# Altium PCB BottomBoard.PcbDoc
Units mm, origin at the board's own origin, x right, y up, seen from the top; angles counter-clockwise.
Board outline 50 x 20 mm, 2 copper layers (Top, Bottom); 57 components, 46 nets, 175 pads, 11 vias.
Unrouted connection lines stored in the file: 39.
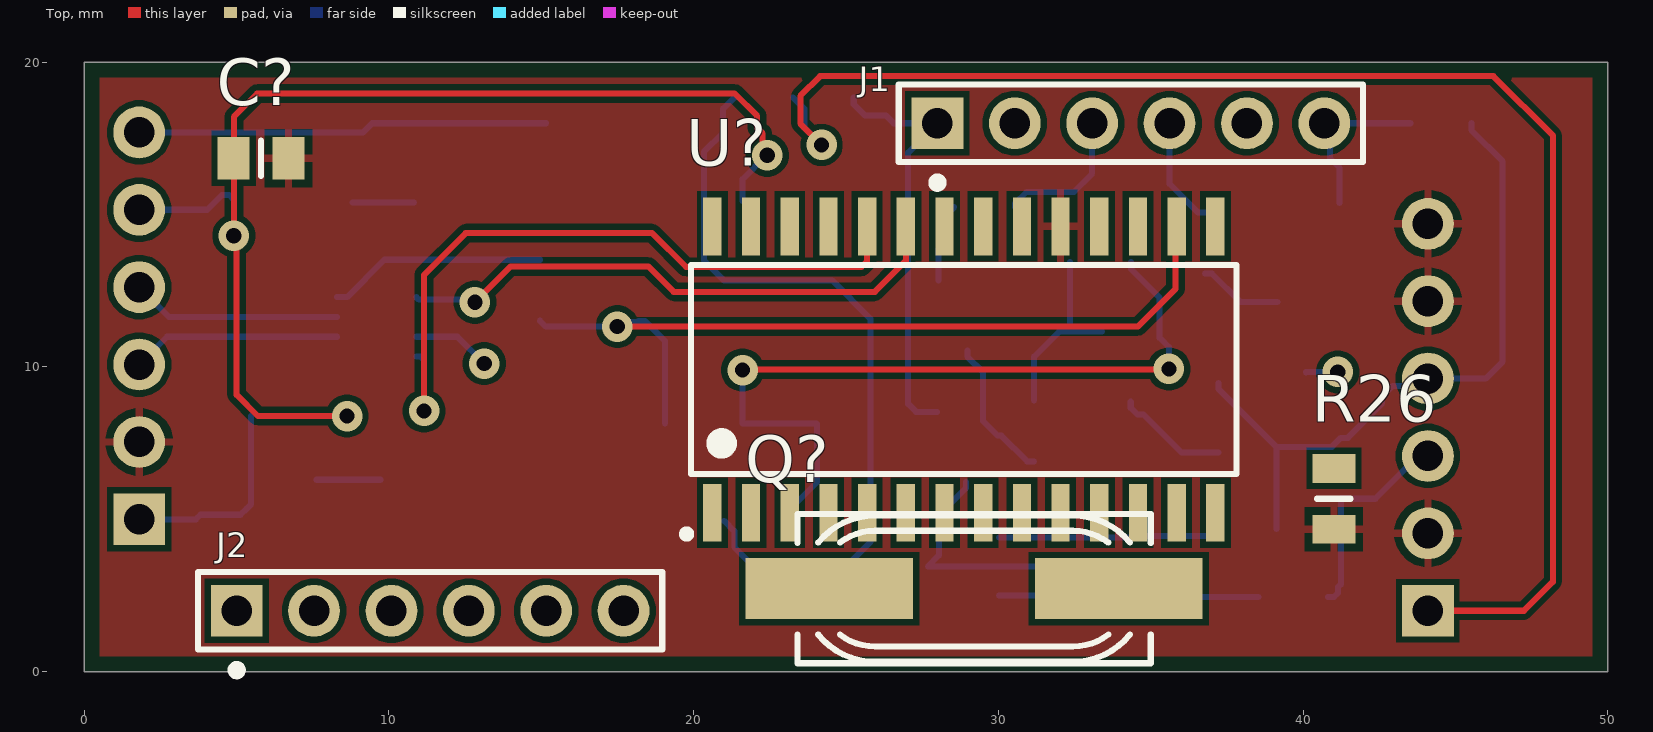
[diagram p0: Top view]
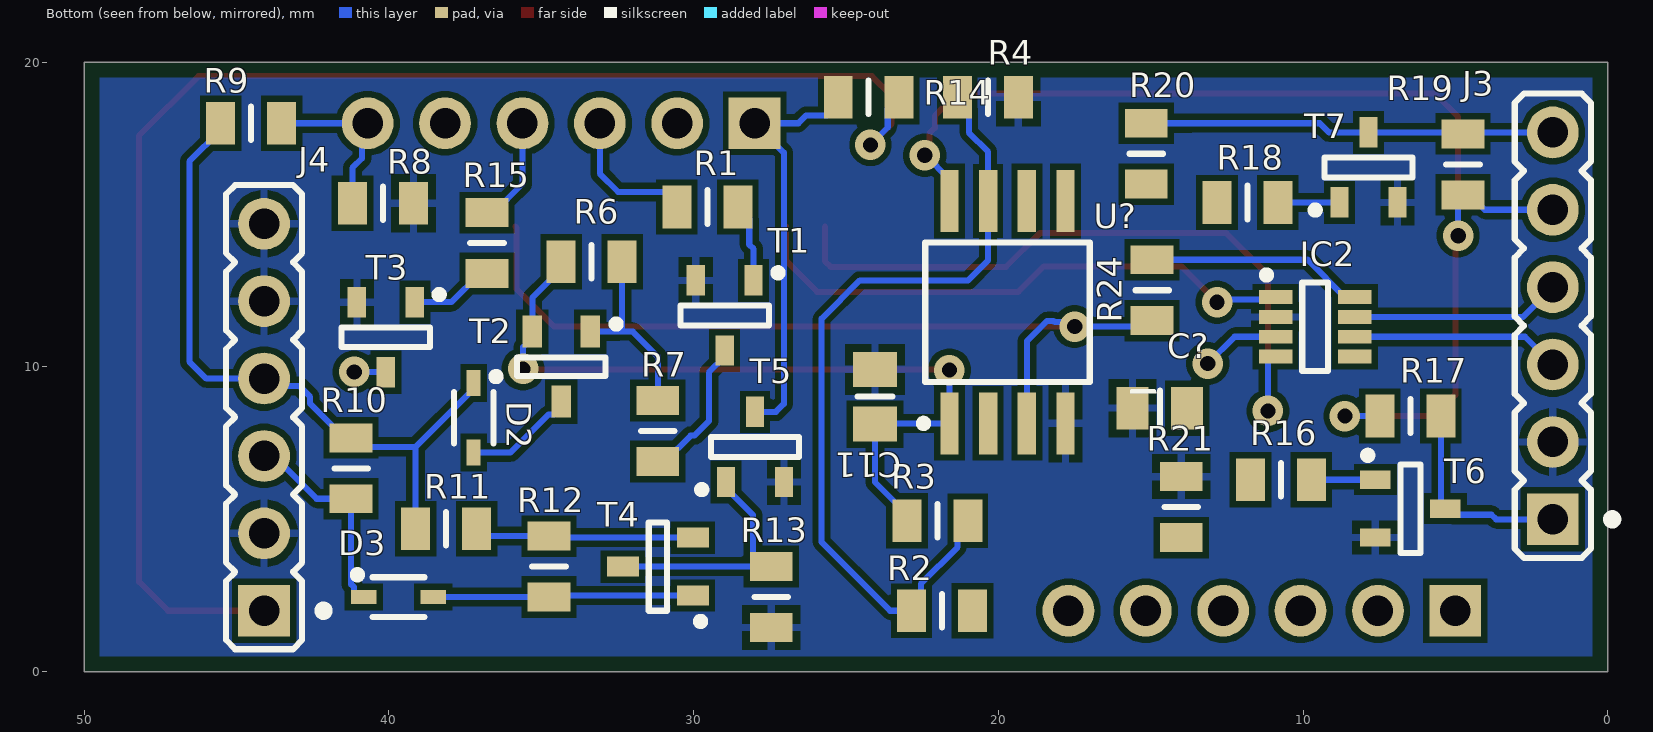
[diagram p1: Bottom view, seen from below]

## Layer stack, top to bottom
Top Solder: solder mask 0.0102, Solder Resist, Dk 3.5
Top: signal copper 0.035
Dielectric 1: dielectric 0.32, FR-4, Dk 4.8
Bottom: signal copper 0.035
Bottom Solder: solder mask 0.0102, Solder Resist, Dk 3.5

## Board outline
50,20 50,0 0,0 0,20

## Design rules (kind name [scope] priority, off if disabled: settings)
BoardOutlineClearance mdCopperDimension [All] p1: gap=0.254 ignorepadtopadclearanceinfootprint=FALSE except(0: Arc-SplitContinuation Track-SplitContinuation SMDPad-SplitContinuation THPad-SplitContinuation Via-SplitContinuation Fill-SplitContinuation Poly-SplitContinuation Region-SplitContinuation Text-SplitContinuation; 0.5: Poly-OutlineEdge Poly-CavityEdge Poly-CutoutEdge Poly-SplitBarrior)
Clearance Clearance_for_PolygonClass_Isolate_19,69 [InPolygonClass('Isolate_19,69') vs IsArc Or IsTrack Or IsPad Or IsVia Or IsFill Or IsRegion Or IsText] p1: gap=0.2 ignorepadtopadclearanceinfootprint=FALSE
Clearance "Clearance (Same Net)" [All] p2: gap=0.2 ignorepadtopadclearanceinfootprint=FALSE
Clearance [All] p3: gap=0.2 ignorepadtopadclearanceinfootprint=FALSE
ComponentClearance [All] p1: gap=0 collisioncheckmode=3 verticalgap=2540 showdistances=FALSE
Height [All] p1: minheight=0 maxheight=30 prefheight=10
HoleSize [All] p1: absolutevalues=TRUE maxlimit=2540 minlimit=0.5 maxpercent=80.000 minpercent=20.000
HoleToHoleClearance mdDrill [All] p1: gap=0.5 allowstackedmicrovias=TRUE
MinimumSolderMaskSliver [All] p1 off: minsoldermaskwidth=0.254
PasteMaskExpansion mlMinCreamFrame [All] p1: expansion=0
PolygonConnect PolygonConnect_For_PolygonThermal_ON_Width0_Gap196850 [InPolygonClass('PolygonThermal_ON_Width0_Gap196850') vs Not IsVia] p1: connectstyle=Relief reliefconductorwidth=0 reliefentries=4 polygonreliefangle="90 Angle" airgapwidth=0.5
PolygonConnect PolygonConnect_For_PolygonThermal_ON_Width196900_Gap196850 [InPolygonClass('PolygonThermal_ON_Width196900_Gap196850') vs Not IsVia] p2: connectstyle=Relief reliefconductorwidth=0.5 reliefentries=4 polygonreliefangle="90 Angle" airgapwidth=0.5
PolygonConnect ThermalVias [IsVia] p3: connectstyle=Direct reliefconductorwidth=0.254 reliefentries=4 polygonreliefangle="90 Angle" airgapwidth=0.254
PolygonConnect [All] p4: connectstyle=Relief reliefconductorwidth=0.254 reliefentries=4 polygonreliefangle="90 Angle" airgapwidth=0.254
RoutingVias [All] p1: holewidth=0.5 width=1 viastyle="Through Hole" minholewidth=0.5 minwidth=1 maxholewidth=2.54 maxwidth=2.54
SolderMaskExpansion mlMinStopFrame [All] p1: expansion=0.05 istentingtop=FALSE
SupplyNets "Schematic Supply Nets_2" [InNet('+5V')] p1: voltage=0.000
SupplyNets "Schematic Supply Nets_1" [InNet('+12V')] p2: voltage=0.000
SupplyNets "Schematic Supply Nets" [InNet('GND')] p3: voltage=0.000
Width [All] p1: maxlimit=0.5 minlimit=0.1 preferedwidth=0.2
24 further rules are at their usual default settings.

## Classes and differential pairs
component class CPU: C? D? J? JP? Q? R? U? Y?
component class BottomBoard: C7 C8 C11 C? D2 D3 IC2 J1 J2 J3 J4 R1 R2 R3 R4 R6 R7 R8 R9 R10 R11 R12 R13 R14 R15 R16 R17 R18 R19 R20 R21 R22 R23 R24 T1 T2 T3 T4 T5 T6 T7 U?

## Components (designator, comment, footprint, x,y, rotation, side; value= is the part's Value field where it differs from the comment)
C2 "100nF" CAPC2012X135N 38.298,22 r180 top
C7 "560p" CAPC2012X135N 2.05,29.9 r270 bottom
C8 "560p" CAPC2012X135N 3.95,26.45 r90 bottom
C11 "4.7uF" CAPC2012X145N 24.05,9.025 r270 bottom
C? "100nF" CAPC2012X135N 31.65,43.25 r180 top
C? "100nF" CAPC2012X135N 28.25,22.25 r180 top
C? "100nF" CAPC2012X135N 5.804,16.85 r180 top
C? "100nF" CAPC2012X135N 14.7,8.65 r180 bottom
D2 "1N4148WS" SODFL2512X100N 37.22,8.335 r270 bottom
D3 "1N4148WS" SODFL2512X100N 39.685,2.45 r180 bottom
IC2 "TCAN332GDCNT" SOT65P280X145-8N 9.6,11.319 r180 bottom
J1 "Socket 6" 3M_929974-01-06-RK 28,18 r0 top
J2 "Socket 6" 3M_929974-01-06-RK 5,2 r0 top
J3 "Header 6" 3M_961106-6404-AR 1.8,5 r90 bottom
J4 "Header 6" 3M_961106-6404-AR 44.1,2 r90 bottom
Q? "4MHz" XTAL1160X490X430 29.204,2.725 r0 top
R1 "4k7" RESC2012X60N 29.55,15.25 r0 bottom
R2 "47k" RESC2012X60N 21.85,2 r180 bottom
R3 "22k" RESC2012X60N 22,4.95 r0 bottom
R4 "4k7" RESC2012X60N 20.344,18.85 r0 bottom
R6 "10k" RESC2012X60N 33.35,13.45 r0 bottom
R7 "4k7" RESC2012X60N 31.175,7.9 r90 bottom
R8 "22k" RESC2012X60N 40.2,15.378 r0 bottom
R9 "10k" RESC2012X60N 44.526,18 r180 bottom
R10 "22k" RESC2012X60N 41.245,6.675 r90 bottom
R11 "10k" RESC2012X60N 38.125,4.685 r0 bottom
R12 "47k" RESC2012X60N 34.75,3.45 r90 bottom
R13 "10k" RESC2012X60N 27.45,2.45 r90 bottom
R14 "4k7" RESC2012X60N 24.255,18.85 r180 bottom
R15 "4k7" RESC2012X60N 36.783,14.069 r90 bottom
R16 "2k2" RESC2012X60N 10.725,6.3 r0 bottom
R17 "510" RESC2012X60N 6.475,8.39 r0 bottom
R18 "2k2" RESC2012X60N 11.825,15.4 r0 bottom
R19 "510" RESC2012X60N 4.75,16.65 r270 bottom
R20 "47k" RESC2012X60N 15.15,17 r270 bottom
R21 "33k" RESC2012X60N 14,5.4 r270 bottom
R22 "100" RESC2012X60N 2.05,26.45 r270 bottom
R23 "100" RESC2012X60N 3.85,29.55 r90 bottom
R24 "4k7" RESC2012X60N 14.954,12.519 r270 bottom
R25 "47k" RESC2012X60N 33.218,22.25 r180 top
R26 "10k" RESC2012X60N 41.015,5.675 r90 top
R? "10k" RESC2012X60N 31.75,26.1 r90 top
R? "10k" RESC2012X60N 56.625,28.4 r0 top
R? "10k" RESC2012X60N 56.725,30.3 r0 top
R? "10k" RESC2012X60N 39.15,26.1 r90 top
R? "10k" RESC2012X60N 35.45,26.1 r90 top
R? "10k" RESC2012X60N 37.3,26.1 r90 top
R? "10k" RESC2012X60N 33.6,26.1 r90 top
T1 "MMBT3904" SOT95P230X110-3N 28.983,11.692 r270 bottom
T2 "MMBT3906LT1G" SOT95P240X110-3N 34.345,10.01 r270 bottom
T3 "MMBT3904" SOT95P230X110-3N 40.104,10.977 r270 bottom
T4 "MMBT3906LT1G" SOT95P240X110-3N 31.175,3.45 r0 bottom
T5 "MMBT3904" SOT95P230X110-3N 27.986,7.375 r90 bottom
T6 "MMBT3904" SOT95P230X110-3N 6.475,5.35 r180 bottom
T7 "MMBT3904" SOT95P230X110-3N 7.85,16.55 r90 bottom
U? "PIC18F25K80" SOIC127P1032X265-28N 28.869,9.917 r90 top
U? "LP2951" 25Q64 19.7,11.8 r90 bottom

## Footprints (in the part's own frame and the unit in brackets; to place one, negate y for a bottom-side part, rotate by r counter-clockwise, add the part's x,y. Pads: shape width x height; smd on the part's side, far side on the other; paste and mask are expansions set on the pad)
3M_929974-01-06-RK [mm] "6 Contacts, Straight .100\" x .100\" Boardmount Socket, 929 Series"
  rect 1.7x1.7 hole 1: 1(0,0)
  round 1.7 hole 1: 2(2.54,0) 3(5.08,0) 4(7.62,0) 5(10.16,0) 6(12.7,0)
  silkscreen extent -1.27,-2.1 13.97,1.27, body extent -1.27,-1.27 13.97,1.27, height 8.25
3M_961106-6404-AR [mm] "6 Contacts, Straight .100\" x .100\" Pin Strip Header, 961 Series"
  rect 1.7x1.7 hole 1: 1(0,0)
  round 1.7 hole 1: 2(2.54,0) 3(5.08,0) 4(7.62,0) 5(10.16,0) 6(12.7,0)
  silkscreen extent -1.26,-2.1 13.98,1.25, body extent -1.27,-1.25 13.98,1.25, height 9.3
25Q64 [mm]
  rect 2.037x0.6 smd: 1(-3.65,1.905) 2(-3.65,0.635) 3(-3.65,-0.635) 4(-3.65,-1.905) 5(3.65,-1.905) 6(3.65,-0.635) 7(3.65,0.635) 8(3.65,1.905)
  silkscreen extent -3.77,-2.7 2.29,2.88, body extent -2.7,-2.7 2.7,2.7, height 1.95
CAPC2012X135N [mm] "Chip Capacitor, Body 2.0x1.25mm, IPC Medium Density"
  rect 1.05x1.4 smd: 1(-0.9,0) 2(0.9,0)
  silkscreen extent 0,-0.58 0,0.58, body extent -1.05,-0.67 1.05,0.68, height 1.25
CAPC2012X145N [mm] "Chip Capacitor, Body 2.0x1.45mm, IPC Medium Density"
  rect 1.15x1.45 smd: 1(-0.9,0) 2(0.9,0)
  silkscreen extent 0,-0.58 0,0.58, body extent -1.05,-0.67 1.05,0.68, height 1.45
RESC2012X60N [mm] "Chip Resistor, EIA 0805, Metric 2012, Body 2.0x1.2mm, IPC Medium Density"
  rect 0.95x1.4 smd: 1(-1,0) 2(1,0)
  silkscreen extent 0,-0.55 0,0.55, body extent -1.1,-0.67 1.1,0.68, height 0.6
SODFL2512X100N [mm] "SODFL Diode; 1.70mm W X 1.25mm L X 1.00mm H body, IPC Medium Density"
  rect 0.84x0.46 smd: 1(-1.14,0) 2(1.14,0)
  silkscreen extent -1.47,-0.65 0.85,0.85, body extent -1.35,-0.65 1.35,0.65, height 1
SOIC127P1032X265-28N [mm] "SOIC,1.27mm, Pitch;28 Pin, 7.50mm W X 17.90mm L X 2.65mm H body, IPC Medium Density"
  rect 1.9x0.6 smd: 1(-4.7,8.255) 2(-4.7,6.985) 3(-4.7,5.715) 4(-4.7,4.445) 5(-4.7,3.175) 6(-4.7,1.905) 7(-4.7,0.635) 8(-4.7,-0.635) 9(-4.7,-1.905) 10(-4.7,-3.175) 11(-4.7,-4.445) 12(-4.7,-5.715) 13(-4.7,-6.985) 14(-4.7,-8.255) 15(4.7,-8.255) 16(4.7,-6.985) 17(4.7,-5.715) 18(4.7,-4.445) 19(4.7,-3.175) 20(4.7,-1.905) 21(4.7,-0.635) 22(4.7,0.635) 23(4.7,1.905) 24(4.7,3.175) 25(4.7,4.445) 26(4.7,5.715) 27(4.7,6.985) 28(4.7,8.255)
  silkscreen extent -5.52,-8.95 3.42,9.22, body extent -5.18,-8.95 5.18,8.95, height 2.65
SOT65P280X145-8N [mm] "SOT, 0.65mm pitch; 8 pin, 1.625mm W X 2.90mm L X 1.45mm H body, IPC Medium Density"
  rect 1.1x0.45 smd: 1(-1.3,0.975) 2(-1.3,0.325) 3(-1.3,-0.325) 4(-1.3,-0.975) 5(1.3,-0.975) 6(1.3,-0.325) 7(1.3,0.325) 8(1.3,0.975)
  silkscreen extent -1.73,-1.45 0.43,1.82, body extent -1.51,-1.45 1.51,1.45, height 1.2
SOT95P230X110-3N [mm] "SOT23, 3 pin, Pitch 0.95mm - 1.3mm W X 2.9mm L X 1.1mm H, IPC Medium Density"
  rect 1x0.6 smd: 1(-1.15,0.95) 2(-1.15,-0.95) 3(1.15,0)
  silkscreen extent -1.52,-1.45 0.33,1.87, body extent -1.08,-1.5 1.25,1.5, height 1.1
SOT95P240X110-3N [mm] "SOT23 3-Leads, Pitch 0.95mm, Body 1.3x2.9mm, IPC Medium Density"
  rect 1.05x0.65 smd: 1(-1.15,0.95) 2(-1.15,-0.95) 3(1.15,0)
  silkscreen extent -1.52,-1.45 0.3,1.92, body extent -1.25,-1.5 1.25,1.5, height 1.1
XTAL1160X490X430 [mm] "HC49/4H SMX Case, SMD Cristal, Body 11.6x4.9mm"
  rect 5.5x2 smd: 1(-4.75,0) 2(4.75,0)
  silkscreen extent -5.8,-2.45 5.8,2.45, body extent -7.15,-2.45 7.15,2.45, height 4.3

## Part data
C2 C7 C8 C? C? C? C?: library part CC0805_100NF_50V_10%_X7R, "Non-polarised capacitor", Case=0805, Manufacturer=GENERIC, Manufacturer1 ComponentHeight=1mm, Manufacturer1 Example=TDK, Manufacturer1 Part Number=C2012X7R1H104K085, Tolerance=±10%, Voltage=50V, Author="CERN DEM JLC", Component Type=Standard, CreateDate=03.12.2007, HelpURL=\\cern.ch\dfs\Applications\Altium\Datasheets\CC0805_X7R_TDK_C.pdf, LatestRevisionDate=22.04.2015, Manufacturer Part Number=CC0805_100NF_50V_10%_X7R, Mounted=Yes, Part Description="SMD Multilayer Chip Ceramic Capacitor", Part Number=CC0805_100NF_50V_10%_X7R, Pin Count=2, Sense=No, SMD=Yes, Socket=No, Status=Preferred, TC=X7R
C11: library part CC0805_4.7UF_50V_10%_X7R, "Non-polarised capacitor", Case=0805, Manufacturer=GENERIC, Manufacturer1 ComponentHeight=1.45mm, Manufacturer1 Example=TDK, Manufacturer1 Part Number=C2012X7R1H475K125, Tolerance=±10%, Voltage=50V, Author="CERN DEM JMW", Component Type=Standard, CreateDate=30.07.2021, HelpURL=\\cern.ch\dfs\Applications\Altium\Datasheets\CC0805_X7R_TDK_C.pdf, LatestRevisionDate=30.07.2021, Manufacturer Part Number=CC0805_4.7UF_50V_10%_X7R, Mounted=Yes, Part Description="SMD Multilayer Chip Ceramic Capacitor", Part Number=CC0805_4.7UF_50V_10%_X7R, Pin Count=2, Sense=No, SMD=Yes, Socket=No, Status=Preferred, TC=X7R
D2 D3: "Diode", Case=SOD-323F, Manufacturer="FAIRCHILD SEMICONDUCTOR", Power=150mA, Voltage=75V, Author="CERN DEM JLC", Bonding=No, Component Type=Standard, ComponentHeight=1mm, CreateDate=12.05.2011, Device=1N4148WS, HelpURL=\\cern.ch\dfs\Applications\Altium\Datasheets\1N4148WS.pdf, LatestRevisionDate=12.05.2011, Manufacturer Part Number=1N4148WS, Mounted=Yes, PackageDescription="SODFL Diode (SOD323F); 1.70mm W X 1.25mm L X 1.00mm H body, IPC Medium Density", Part Description="Small Signal Diodes", Part Number=1N4148WS, Pin Count=2, PressFit=No, Sense=No, SMD=Yes, Socket=No
IC2: "3.3V CAN Transceivers with CAN FD (Flexible Data Rate)", Case=SOT23-8, Manufacturer="TEXAS INSTRUMENTS", Author="CERN DEM JLC", Bonding=No, Component Type=Standard, ComponentHeight=1.45mm, CreateDate=22.08.2017, Device=TCAN332GDCNT, HelpURL=\\cern.ch\dfs\Applications\Altium\Datasheets\TCAN332GDCNT.pdf, LatestRevisionDate=22.08.2017, Manufacturer Part Number=TCAN332GDCNT, Mounted=Yes, PackageDescription="SOT, 0.65mm Pitch; 8 pin, 1.625mm W X 2.90mm L X 1.45mm H body, IPC Medium Density", Part Description="3.3V CAN Transceivers with CAN FD (Flexible Data Rate)", Part Number=TCAN332GDCNT, Pin Count=8, PressFit=No, Sense=No, SMD=Yes, Socket=No
J1 J2: library part 3M_929974-01-06-RK, "Connector 6 Female", Manufacturer=3M, Manufacturer Part Number=929974-01-06-RK, Author="CERN DEM JMW", Component Type=Standard, ComponentHeight=8.26mm, CreateDate=31.08.2016, Family="Socket 6", HelpURL=\\cern.ch\dfs\Applications\Altium\Datasheets\3M_929974-01-06-RK.pdf, LatestRevisionDate=31.08.2016, Mounted=Yes, Part Description="6 Contacts, Straight .100\" x .100\" Boardmount Socket, 929 Series", Part Number=3M_929974-01-06-RK, Pin Count=6, PressFit=No, Sense=No, SMD=No, Socket=No, Status=None
J3 J4: library part 3M_961106-6404-AR, "Connector 6 Male", Manufacturer=3M, Manufacturer Part Number=961106-6404-AR, Author="CERN DEM MR", Component Type=Standard, ComponentHeight=8mm, CreateDate=05.09.2016, Family="Header 6", HelpURL=\\cern.ch\dfs\Applications\Altium\Datasheets\3M_961106-6404-AR.pdf, LatestRevisionDate=05.09.2016, Mounted=Yes, Part Description="6 Contacts, Straight .100\" x .100\" Pin Strip Header, 961 Series", Part Number=3M_961106-6404-AR, Pin Count=6, PressFit=No, Sense=No, SMD=No, Socket=No, Status=None
Q?: library part XTAL_40MHZ_IQD_LFXTAL033584, "Quartz Crystal", Manufacturer="IQD FREQUENCY PRODUCTS", Manufacturer Part Number="LF XTAL033584", Author="CERN DEM JLC", Bonding=No, Component Type=Standard, ComponentHeight=4.3mm, CreateDate=02.04.2012, HelpURL=\\cern.ch\dfs\Applications\Altium\Datasheets\XTAL_IQD_HC49-4HSMX.pdf, LatestRevisionDate=07.11.2016, Mounted=Yes, PackageDescription="HC-49/4HSMX Case, SMD Crystal; 2 Pins, Body 11.6mm L X 4.90mm W X 4.30mm H", Part Description="Tolerance: ± 30ppm, Stability: ± 50ppm, -10°C to +66°C, 18pF, Surface Mount Quartz Crystal, HC49/4HSMX Series", Part Number=XTAL_40MHZ_IQD_LFXTAL033584, Pin Count=2, PressFit=No, Sense=No, SMD=Yes, Socket=No
R1 R4 R7 R12 R14 R15 R24: library part R0805_4K7_1%_0.125W_100PPM, "Resistor - 1%", Case=0805, Manufacturer=GENERIC, Manufacturer1 ComponentHeight=0.6mm, Manufacturer1 Example="NIC COMPONENT", Manufacturer1 Part Number=NRC10F4701TRF, Power=0.125W, Tolerance=±1%, Author="CERN DEM JLC", Component Type=Standard, CreateDate=03.12.2007, HelpURL=\\cern.ch\dfs\Applications\Altium\Datasheets\R0805_NIC_NRC.pdf, LatestRevisionDate=13.03.2008, Manufacturer Part Number=R0805_4K7_1%_0.125W_100PPM, Mounted=Yes, Part Description="General Purpose Thick Film Chip Resistor", Part Number=R0805_4K7_1%_0.125W_100PPM, Pin Count=2, PressFit=No, Sense=No, SMD=Yes, Socket=No, Status=Preferred, TC=±100ppm/°C
R2: library part R0805_47K_1%_0.125W_100PPM, "Resistor - 1%", Case=0805, Manufacturer=GENERIC, Manufacturer1 ComponentHeight=0.6mm, Manufacturer1 Example="NIC COMPONENT", Manufacturer1 Part Number=NRC10F4702TRF, Power=0.125W, Tolerance=±1%, Author="CERN DEM JLC", Component Type=Standard, CreateDate=03.12.2007, HelpURL=\\cern.ch\dfs\Applications\Altium\Datasheets\R0805_NIC_NRC.pdf, LatestRevisionDate=13.03.2008, Manufacturer Part Number=R0805_47K_1%_0.125W_100PPM, Mounted=Yes, Part Description="General Purpose Thick Film Chip Resistor", Part Number=R0805_47K_1%_0.125W_100PPM, Pin Count=2, PressFit=No, Sense=No, SMD=Yes, Socket=No, Status=Preferred, TC=±100ppm/°C
R3: library part R0805_22K_1%_0.125W_100PPM, "Resistor - 1%", Case=0805, Manufacturer=GENERIC, Manufacturer1 ComponentHeight=0.6mm, Manufacturer1 Example="NIC COMPONENT", Manufacturer1 Part Number=NRC10F2202TRF, Power=0.125W, Tolerance=±1%, Author="CERN DEM JLC", Component Type=Standard, CreateDate=03.12.2007, HelpURL=\\cern.ch\dfs\Applications\Altium\Datasheets\R0805_NIC_NRC.pdf, LatestRevisionDate=13.03.2008, Manufacturer Part Number=R0805_22K_1%_0.125W_100PPM, Mounted=Yes, Part Description="General Purpose Thick Film Chip Resistor", Part Number=R0805_22K_1%_0.125W_100PPM, Pin Count=2, PressFit=No, Sense=No, SMD=Yes, Socket=No, Status=Preferred, TC=±100ppm/°C
R6 R9 R11 R13 R25 R26 R? R? R? R? R? R? R?: library part R0805_10K_1%_0.125W_100PPM, "Resistor - 1%", Case=0805, Manufacturer=GENERIC, Manufacturer1 ComponentHeight=0.6mm, Manufacturer1 Example="NIC COMPONENT", Manufacturer1 Part Number=NRC10F1002TRF, Power=0.125W, Tolerance=±1%, Author="CERN DEM JLC", Component Type=Standard, CreateDate=03.12.2007, HelpURL=\\cern.ch\dfs\Applications\Altium\Datasheets\R0805_NIC_NRC.pdf, LatestRevisionDate=13.03.2008, Manufacturer Part Number=R0805_10K_1%_0.125W_100PPM, Mounted=Yes, Part Description="General Purpose Thick Film Chip Resistor", Part Number=R0805_10K_1%_0.125W_100PPM, Pin Count=2, PressFit=No, Sense=No, SMD=Yes, Socket=No, Status=Preferred, TC=±100ppm/°C
R8 R10 R16 R17 R18 R19 R20 R21 R22 R23: library part R0805_2K2_1%_0.125W_100PPM, "Resistor - 1%", Case=0805, Manufacturer=GENERIC, Manufacturer1 ComponentHeight=0.6mm, Manufacturer1 Example="NIC COMPONENT", Manufacturer1 Part Number=NRC10F2201TRF, Power=0.125W, Tolerance=±1%, Author="CERN DEM JLC", Component Type=Standard, CreateDate=03.12.2007, HelpURL=\\cern.ch\dfs\Applications\Altium\Datasheets\R0805_NIC_NRC.pdf, LatestRevisionDate=13.03.2008, Manufacturer Part Number=R0805_2K2_1%_0.125W_100PPM, Mounted=Yes, Part Description="General Purpose Thick Film Chip Resistor", Part Number=R0805_2K2_1%_0.125W_100PPM, Pin Count=2, PressFit=No, Sense=No, SMD=Yes, Socket=No, Status=Preferred, TC=±100ppm/°C
T1 T3 T5 T6 T7: "NPN Transistor", Case=SOT23-3, Manufacturer=NEXPERIA, Author="CERN DEM JLC", Bonding=No, Component Type=Standard, ComponentHeight=1.1mm, CreateDate=10.02.2010, Device=MMBT3904, HelpURL=\\cern.ch\dfs\Applications\Altium\Datasheets\MMBT3904.pdf, LatestRevisionDate=16.09.2021, Manufacturer Part Number=MMBT3904, Mounted=Yes, PackageDescription="SOT23, 0.95mm Pitch; 3 Pin, 1.30mm W X 2.90mm L X 1.10mm H body, IPC Medium Density", Part Description="40V 200mA NPN Switching Transistor", Part Number=MMBT3904, Pin Count=3, PressFit=No, Sense=No, SMD=Yes, Socket=No
T2 T4: "PNP Transistor", Case=SOT23-3, Manufacturer="ON SEMICONDUCTOR", Author="CERN DEM JLC", Bonding=No, Component Type=Standard, ComponentHeight=1.1mm, CreateDate=29.03.2012, Device=MMBT3906LT1G, HelpURL=\\cern.ch\dfs\Applications\Altium\Datasheets\MMBT3906LT1G.pdf, LatestRevisionDate=29.03.2012, Manufacturer Part Number=MMBT3906LT1G, Mounted=Yes, PackageDescription="SOT23, 0.95mm Pitch; 3 Pin, 1.40mm W X 3.00mm L X 1.10mm H body, IPC Medium Density", Part Description="40V 200mA PNP General Purpose Transistor", Part Number=MMBT3906LT1G, Pin Count=3, PressFit=No, Sense=No, SMD=Yes, Socket=No
U?: "PIC PICÂ® XLPâ„¢ 18K Microcontroller IC 8-Bit 64MHz 32KB (16K x 16) FLASH 28-QFN-S (6x6)", Package="QFN-28 Microchip", Check_prices=https://www.snapeda.com/parts/PIC18F25K80/Microchip/view-part/?ref=eda, MF=Microchip, MP=PIC18F25K80, SnapEDA_Link=https://www.snapeda.com/parts/PIC18F25K80/Microchip/view-part/?ref=snap

## Via types
v1: diameter 1, hole 0.5, Top to Bottom, 11 vias

## Nets (pads, with @x,y where several pads share a name; then routed paths per layer and width w, separated by ;. In a path a pad name is that pad's centre, name@x,y a point inside that pad or via, vN(x,y) a via of type N, cw(c..) or ccw(c..) an arc to the next point about the centre after c; other vN are vias at no path point)
+5V: C?.2@13.8,8.65 IC2.3 J4.1 R14.2 U?.1@20.614,5.217 U?.5@25.694,5.217 U?.7@28.234,5.217 U?.20 | length 51.4
  Top w0.2: v1(24.2,17.29) 23.5,17.99 23.5,18.898 24.152,19.55 46.25,19.55 48.2,17.6 48.2,2.95 47.25,2 J4.1
  Bottom w0.2: IC2.3 12.245,10.994 v1(13.125,10.114) ; R14.2 23.63,18.475 23.63,17.86 v1(24.2,17.29)
+12V: C?.2@4.904,16.85 J3.5 R17.2 R19.2 R25.2 U?.8@21.605,15.45 | length 39.9
  Top w0.2: v1(8.625,8.39) 5.7,8.39 5,9.09 5,14.218 v1(4.908,14.31) 4.908,18.208 5.677,18.977 21.344,18.977 22.08,18.241 22.08,17.848 22.262,17.665 22.262,17.101 v1(22.415,16.948)
  Bottom w0.2: J3.5 4.035,15.16 4.525,15.65 R19.2 4.908,15.492 v1(4.908,14.31) ; R17.2 v1(8.625,8.39) ; U?.8@21.605,15.45 21.605,16.168 22.384,16.948 v1(22.415,16.948)
BaudRate: U?.6@26.964,5.217
CAN-H: IC2.7 J3.4 R22.2 | length 6.9
  Bottom w0.2: J3.4 2.776,11.644 IC2.7
CAN-L: IC2.6 J3.3 R23.2 | length 6.9
  Bottom w0.2: J3.3 2.714,10.994 IC2.6
CANRx: IC2.4 U?.24 | length 23.2
  Top w0.2: v1(11.15,8.558) 11.15,13.025 12.519,14.394 18.638,14.394 19.749,13.284 25.5,13.284 25.694,13.478 U?.24
  Bottom w0.2: IC2.4 11.025,10.344 11.15,10.219 v1(11.15,8.558)
CANTx: IC2.1 U?.23 | length 18.5
  Top w0.2: v1(12.819,12.127) 13.992,13.3 18.509,13.3 19.343,12.466 25.945,12.466 26.964,13.485 U?.23
  Bottom w0.2: IC2.1 10.984,12.21 12.735,12.21 v1(12.819,12.127)
GND: C2.1 C7.1 C8.1 C11.1 C?.1@6.704,16.85 C?.1@15.6,8.65 C?.1@29.15,22.25 C?.2@30.75,43.25 IC2.2 J3.2 J4.2 J4.5 J4.6 R4.1 R8.1 R13.1 R21.1 R26.1 T1.2 T3.2 T5.2 T6.2 T7.2 U?.4@17.795,8.15 U?.19
IGN_Mon: U?.15
ISO-K: J3.6 R19.1 R20.1 T7.3 | length 13.5
  Bottom w0.2: J3.6 9.15,17.7 9.45,18 13.644,18 R20.1
ISO-L: J3.1 R17.1 T6.3 | length 6.8
  Bottom w0.2: J3.1 3.662,5 3.812,5.15 5.125,5.15 T6.3 5.475,5.5 R17.1
ISOIn: R20.2 R21.2 U?.12
ISOK: R18.2 U?.21
ISOL: R16.2 U?.22
J1850+: D2.1 J4.4 R9.1 R10.2 R11.2 | length 22.5
  Bottom w0.2: D2.1 37.22,9.285 39.125,7.38 ; R11.2 39.125,7.38 ; R9.1 45.526,17.775 46.55,16.751 46.55,10.175 45.995,9.62 J4.4 43.858,9.378 42.95,9.378 42.591,9.019 42.591,8.796 41.47,7.675 R10.2 40.95,7.38 39.125,7.38
J1850-: D3.1 J4.3 R10.1 T3.3 | length 8
  Bottom w0.2: T3.3 40.116,9.84 v1(41.142,9.84) ; D3.1 41.015,2.45 41.145,2.58 41.145,2.77 41.245,2.87 R10.1 42.375,5.675 43.78,7.08 J4.3
J1850Bus+: J1.3 R1.2 U?.4@24.424,5.217 | length 4.7
  Bottom w0.2: R1.2 30.55,15.369 30.925,15.744 32.479,15.744 33.08,16.345 J1.3
J1850Bus-: J1.4 R15.2 U?.14 | length 3.5
  Bottom w0.2: J1.4 35.62,16.345 35.62,16.006 36.558,15.069 R15.2
J1850PWR: C11.2 J1.5 R3.2 R6.2 T2.2 U?.1@21.605,8.15 | length 25.9
  Top w0.2: v1(21.605,9.9) 21.622,9.917 35.584,9.917 v1(35.601,9.935)
  Bottom w0.2: v1(21.605,9.9) 21.605,8.15 24.025,8.15 C11.2 24.05,6.225 23,5.175 R3.2 ; R6.2 34.35,13.225 35.295,12.28 T2.2 35.295,10.96 35.601,10.654 v1(35.601,9.935)
J1850Volts: R2.2 U?.3@23.154,5.217
NetC7_2: C7.2 R22.1
NetC8_2: C8.2 R23.1
NetC?_1: C?.1@32.55,43.25 Q?.2 U?.9
NetC?_2: C?.2@27.35,22.25 Q?.1 U?.10
NetD2_2: D2.2 T2.3 | length 3.7
  Bottom w0.2: T2.3 34.345,8.66 34.57,8.435 34.77,8.435 36.01,7.195 D2.2
NetD3_2: D3.2 R12.1 T4.1 | length 8.5
  Bottom w0.2: T4.1 34.7,2.5 R12.1 D3.2
NetIC2_8: IC2.8 R24.1 | length 7.2
  Bottom w0.2: IC2.8 8.625,12.294 9.85,13.519 R24.1
NetR1_1: R1.1 T1.1 | length 2.6
  Bottom w0.2: T1.1 28.033,13.875 28.175,14.017 28.175,14.875 R1.1
NetR2_1: R2.1 R3.1 R4.2 U?.7@20.335,15.45 | length 27
  Bottom w0.2: R3.1 21.337,4.613 21.337,4.088 22.542,2.883 22.542,2.308 R2.1 23.55,2 25.8,4.25 25.8,11.588 24.547,12.842 20.993,12.842 20.335,13.5 20.335,15.45 20.335,17.06 20.969,17.694 20.969,18.475 R4.2
NetR6_1: R6.1 R7.2 T2.1 | length 6.3
  Bottom w0.2: R7.2 31.175,10.342 31.993,11.16 32.35,11.16 32.432,11.16 ; R6.1 32.35,11.242 32.432,11.16 ; T2.1 32.432,11.16
NetR7_1: R7.1 T1.3 | length 4.8
  Bottom w0.2: T1.3 28.983,10.342 29.5,9.824 29.5,8.225 29.975,7.75 30.1,7.75 30.95,6.9 R7.1
NetR11_1: R11.1 R12.2 T4.2 | length 7.2
  Bottom w0.2: T4.2 34.7,4.4 R12.2 36.889,4.45 R11.1
NetR13_2: R13.2 T4.3 T5.1 | length 7.9
  Bottom w0.2: T5.1 28.936,6.025 28.05,5.139 28.05,3.814 27.686,3.45 T4.3
NetR15_1: R15.1 T3.1 | length 2.8
  Bottom w0.2: R15.1 37.008,13.069 37.949,12.127 T3.1
NetR16_1: R16.1 T6.1 | length 2.1
  Bottom w0.2: T6.1 R16.1
NetR18_1: R18.1 T7.1 | length 2
  Bottom w0.2: T7.1 R18.1
OBDRxLED: R?.1@37.3,25.1 U?.27
OBDTxLED: R?.1@39.15,25.1 U?.28
PWMIn: J1.1 R14.1 T5.3 U?.13 | length 13.9
  Bottom w0.2: R14.1 25.255,18.625 25.63,18.25 26.315,18.25 26.565,18 J1.1 27.036,17.036 27.036,8.792 27.304,8.525 T5.3
PwrCtrl/Busy: R24.2 R?.1@31.75,25.1 U?.3@19.065,8.15 U?.16 | length 28.2
  Top w0.2: v1(17.495,11.326) 34.58,11.326 35.82,12.567 35.82,14.584 U?.16
  Bottom w0.2: R24.2 15.147,11.326 17.302,11.326 17.495,11.519 17.535,11.48 18.161,11.48 18.195,11.514 18.395,11.514 19.065,10.844 U?.3@19.065,8.15
RS232_Rx: U?.18
RS232_Tx: U?.17
RS232RxLED: R?.1@33.6,25.1 U?.25
RS232TxLED: R?.1@35.45,25.1 U?.26
VMeasure: C2.2 R25.1 R26.2 U?.2@21.884,5.217
VPWIn: J1.6 R8.2 R9.2 U?.11 | length 5.7
  Bottom w0.2: R8.2 41.2,16.536 40.886,16.85 40.886,17.814 J1.6 R9.2
pads on no net: IC2.5 J1.2 J2.1 J2.2 J2.3 J2.4 J2.5 J2.6 R?.1@55.625,28.4 R?.1@55.725,30.3 R?.2 U?.2@20.335,8.15 U?.5@17.795,15.45 U?.6@19.065,15.45 U?.8@29.504,5.217

## Polygon pours and split planes (outlines as drawn)
GND on Bottom "GND_L02_P018" (solid, pour order 18): 0,0 0,20 50,20 50,0
GND on Top "GND_L01_P019" (solid, pour order 19): 0,0 0,20 50,20 50,0

## Silkscreen, mask and mechanical layers (free items; w line width, h text height)
Top Overlay:
  lines w0.1: 77.47,22.225 81.915,22.225 ; 77.47,24.765 79.375,24.765 80.01,25.4 80.01,29.845 80.645,30.48 83.82,30.48 84.455,31.115 ; 81.915,28.575 84.455,28.575
  text "FACTORY" at 78.998,59.613 h0.85
  text "RESET" at 79.847,58.113 h0.85
  text "Tx" at 97.03,48.102 h0.85 r90
  text "OBD" at 97.03,44.502 h0.85 r90
  text "Rx" at 97.03,41.752 h0.85 r90
  text "n/c" at 87.991,38.374 h0.85 r45
  text "+5V" at 87.991,35.834 h0.85 r45
  text "Tx" at 97.03,35.402 h0.85 r90
  text "GND" at 87.991,33.294 h0.85 r45
  text "BT" at 97.03,32.227 h0.85 r90
  text "Tx" at 87.991,30.754 h0.85 r45
  text "Rx" at 97.03,29.052 h0.85 r90
  text "Rx" at 87.991,28.214 h0.85 r45
  text "n/c" at 87.991,25.674 h0.85 r45
  text "Rx" at 75.565,24.255 h0.85
  text "BT" at 84.932,22.985 h0.85
  text "Tx" at 75.565,21.715 h0.85
  text "ENABLE" at 90.217,18.973 h0.85
  text "LEDS" at 91.067,17.473 h0.85
Bottom Overlay:
  region: 15.635,9.265 15.635,9.255 14.865,9.255 14.865,9.265
  region: 15.655,9.255 15.655,9.245 14.845,9.245 14.845,9.255
  region: 15.655,9.245 15.655,9.235 14.845,9.235 14.845,9.245
  region: 15.665,9.235 15.665,9.225 14.835,9.225 14.835,9.235
  region: 15.665,9.225 15.665,9.215 14.835,9.215 14.835,9.225
  region: 15.665,9.215 15.665,9.205 14.835,9.205 14.835,9.215
  region: 15.665,9.205 15.665,9.195 14.835,9.195 14.835,9.205
  region: 15.665,9.195 15.665,9.185 14.835,9.185 14.835,9.195
  region: 15.675,9.185 15.675,9.175 14.825,9.175 14.825,9.185
  region: 15.675,9.175 15.675,9.165 14.825,9.165 14.825,9.175
  region: 15.675,9.165 15.675,9.155 14.825,9.155 14.825,9.165
  region: 15.675,9.155 15.675,9.145 14.825,9.145 14.825,9.155